# Altium PCB Flasher_2Ch_ISO_Astable.PcbDoc
Units mil, origin at the board's own origin, x right, y up, seen from the top; angles counter-clockwise.
Board outline 2362.21 x 1771.65 mil, 2 copper layers (Top Layer, Bottom Layer); 36 components, 22 nets, 82 pads, 0 vias.
Unrouted connection lines stored in the file: 50.
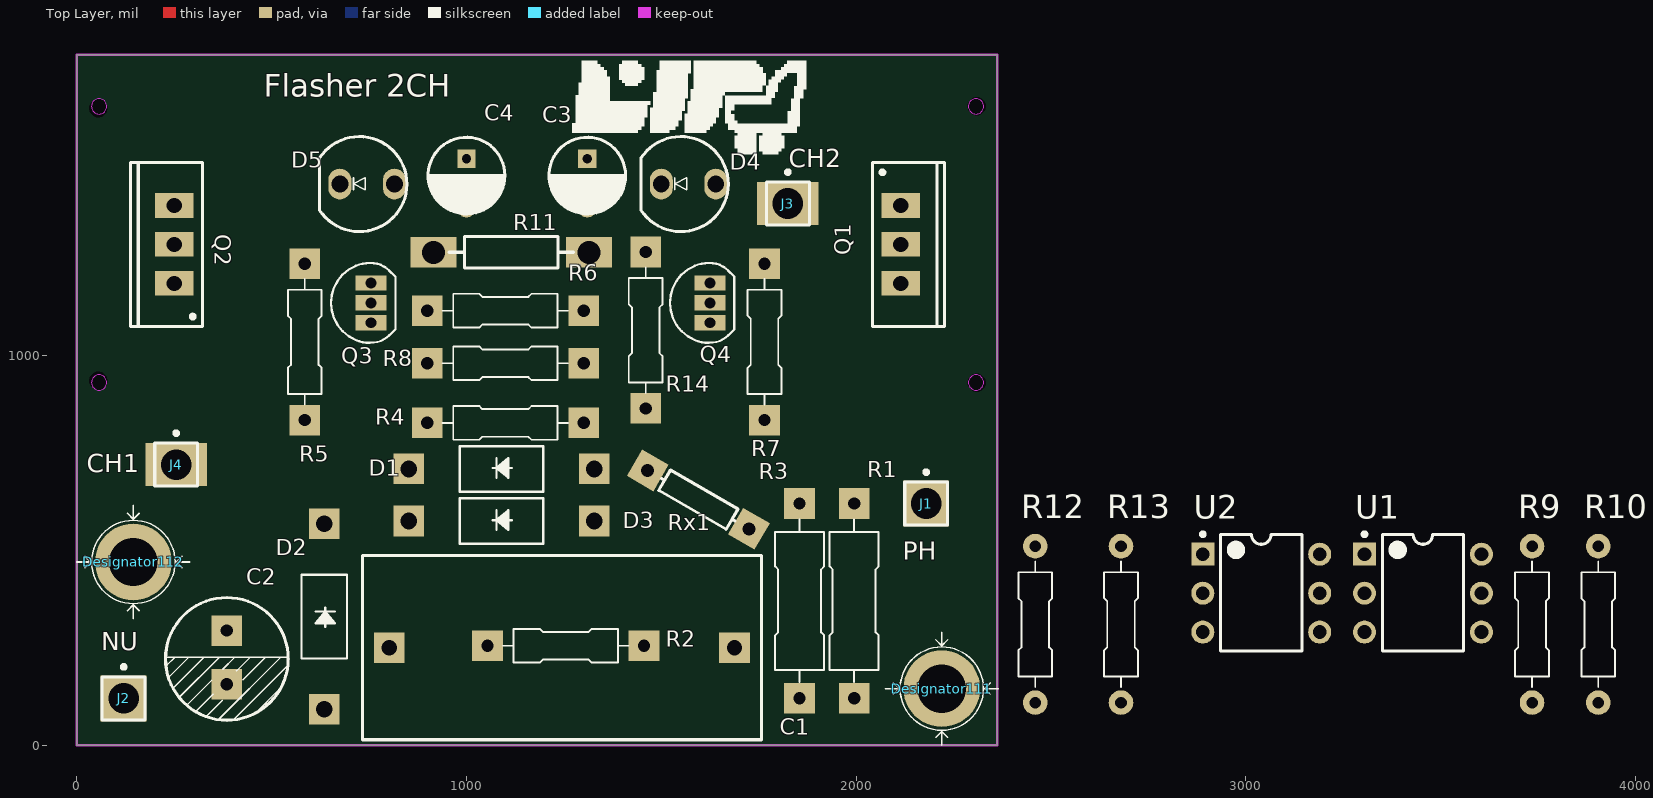
[diagram p0: Top Layer view]
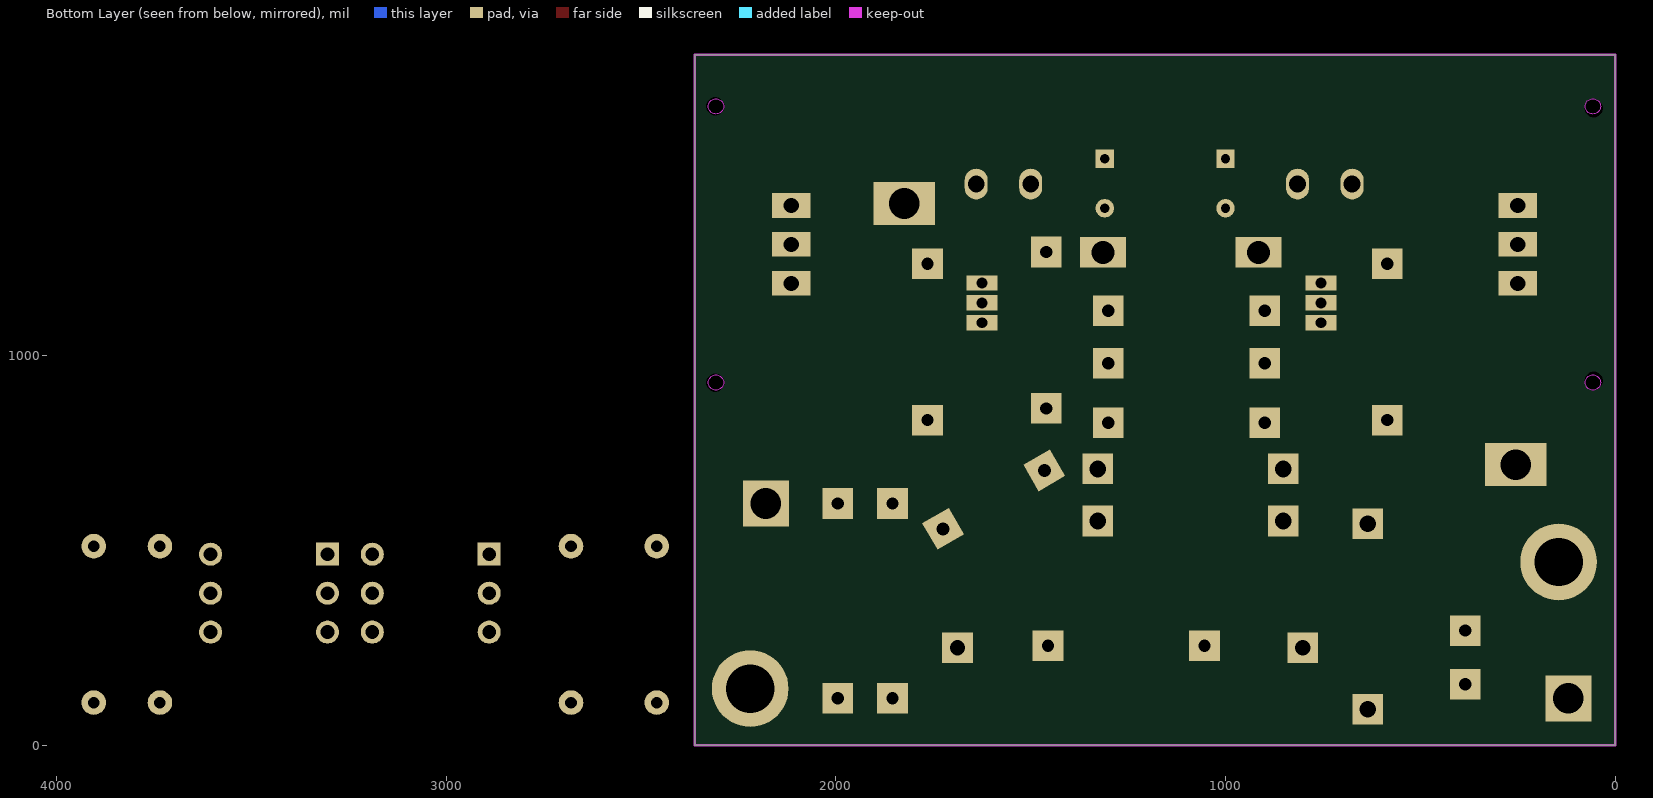
[diagram p1: Bottom Layer view, seen from below]

## Layer stack, top to bottom
Top Solder: solder mask 0.4, Solder Resist, Dk 3.5
Top Layer: signal copper 1.4
Dielectric 1: dielectric 12.6, FR-4, Dk 4.8
Bottom Layer: signal copper 1.4
Bottom Solder: solder mask 0.4, Solder Resist, Dk 3.5

## Board outline
0,0 2362.21,0 2362.19,1771.65 0,1771.65

## Design rules (kind name [scope] priority, off if disabled: settings)
Clearance [All] p1: gap=15 ignorepadtopadclearanceinfootprint=TRUE except(10: Arc-THPad Track-THPad THPad-THPad; 11: Arc-Arc Arc-Track Track-Track)
PolygonConnect [All] p1: connectstyle=Relief reliefconductorwidth=10 reliefentries=4 polygonreliefangle="90 Angle" airgapwidth=10
RoutingVias [All] p1: holewidth=28 width=50 viastyle="Through Hole" minholewidth=28 minwidth=50 maxholewidth=28 maxwidth=50
SolderMaskExpansion [All] p1: expansion=4 istentingtop=FALSE
Width [All] p1: maxlimit=200 minlimit=10 preferedwidth=50 minimp=50.000000 maximp=50.000000 favimp=50.000000
30 further rules are at their usual default settings.

## Classes and differential pairs
component class Flasher_2Ch_ISO_Astable: C1 C2 C3 C4 D1 D2 D3 D4 J1 J2 J3 Q1 Q2 Q4 R1 R2 R3 R5 R8 R12 R14 Rx1 U1 U2

## Components (designator, comment, footprint, x,y, rotation, side; value= is the part's Value field where it differs from the comment)
C1 "Cap" Cap_polyester_275V_P22.5 1245,250 r0 top value=1uF/275V/X2
C2 "Cap2" "Cap electrolitic radial 8x12-3.5" 385,225 r270 top value=470uF/16V
C3 "Cap2" "Cap electrolitic radial 5x11-2" 1310,1465.63 r270 top value=100uF/16V
C4 "Cap2" "Cap electrolitic radial 5x11-2" 1000,1465.63 r270 top value=100uF/16V
D1 "Diode 1N4007" DO-204AL 1095,713.96 r180 top
D2 "8.2V/1W" DO-204AL 640,325 r90 top
D3 "Diode 1N4007" DO-204AL 1095,580 r180 top
D4 "LED0" LED5MM_RED 1550,1440 r180 top
D5 "LED0" LED5MM_RED 725,1440 r180 top
Designator111 "Comment" "Board Screw simple 3mm" 2220,145 r0 top
Designator112 "Comment" "Board Screw simple 3mm" 145,470 r0 top
J1 "Socket" PIN1#1 2180,620 r0 top
J2 "Socket" PIN1#1 120,120 r0 top
J3 "Socket" PIN1#2 1825,1390 r0 top
J4 "Socket" PIN1#2 255,720 r0 top
Q1 "BT137-600" "TO-220 AB with heatsink ya25" 2115,1285 r270 top
Q2 "BT137-600" "TO-220 AB with heatsink ya25" 250,1285 r90 top
Q3 "2N3904" "TO-92 STR" 755,1135 r90 top
Q4 "2N3904" "TO-92 STR" 1625,1135 r90 top
R1 "Res1" "Axial 0_5W 5_0mm" 1995,370 r90 top value=100/0.5W
R2 "Res1" "Axial 0_25 W, 0_4 IN LEAD PITCH"#1 1255,255 r0 top value=470K
R3 "Res1" "Axial 0_5W 5_0mm" 1855,370 r90 top value=100/0.5W
R4 "Res1" "Axial 0_25 W, 0_4 IN LEAD PITCH"#1 1100,827.08 r180 top value=100R
R5 "Res1" "Axial 0_25 W, 0_4 IN LEAD PITCH"#1 585,1035 r270 top value=560R
R6 "Res1" "Axial 0_25 W, 0_4 IN LEAD PITCH"#1 1100,1115 r180 top value=39K
R7 "Res1" "Axial 0_25 W, 0_4 IN LEAD PITCH"#1 1765,1035 r90 top value=560R
R8 "Res1" "Axial 0_25 W, 0_4 IN LEAD PITCH"#1 1100,980 r0 top value=39K
R9 "Res1" "Axial 0_25 W, 0_4 IN LEAD PITCH"#2 3735,310 r90 top value=360
R10 "Res1" "Axial 0_25 W, 0_4 IN LEAD PITCH"#2 3905,310 r90 top value=360
R11 "Res Adj1" AXIAL-0.4 1115,1265 r0 top value=10K
R12 "Res1" "Axial 0_25 W, 0_4 IN LEAD PITCH"#2 2460,310 r90 top value=360
R13 "Res1" "Axial 0_25 W, 0_4 IN LEAD PITCH"#2 2680,310 r90 top value=360
R14 "Res1" "Axial 0_25 W, 0_4 IN LEAD PITCH"#1 1460,1065 r270 top value=680R
Rx1 "Res1" axial-0.3 1595.1,630 r150 top value=0R
U1 "MOC3063" DIP-6 3305,490 r0 top
U2 "MOC3063" DIP-6 2890,490 r0 top

## Footprints (in the part's own frame and the unit in brackets; to place one, negate y for a bottom-side part, rotate by r counter-clockwise, add the part's x,y. Pads: shape width x height; smd on the part's side, far side on the other; paste and mask are expansions set on the pad)
"Axial 0_5W 5_0mm" [mm] "Designer Abbas Basereh"
  rect 2x2 hole 0.8: 1(6.35,0) 2(-6.35,0)
  silkscreen extent -5.3,-1.6 5.3,1.6, body extent -6.7,-1.65 6.7,1.65, height 4.02
"Axial 0_25 W, 0_4 IN LEAD PITCH"#1 [mm] "Designer Abbas Basereh"
  rect 2x2 hole 0.8: 1(5.1,0) 2(-5.1,0)
  silkscreen extent -4.1,-1.1 4.1,1.1, body extent -5.4,-1.16 5.36,1.16, height 3.63
"Axial 0_25 W, 0_4 IN LEAD PITCH"#2 [mm] "Designer Abbas Basereh"
  round 1.6 hole 0.75: 1(5.1,0) 2(-5.1,0)
  silkscreen extent -4.1,-1.1 4.1,1.1, body extent -5.4,-1.16 5.36,1.16, height 3.63
axial-0.3 [mm] "Axial Device, Thru-Hole; 2 Leads; 0.3 in Pin Spacing"
  rect 2x2 hole 0.85: 1(-3.81,0) 2(3.81,0)
  silkscreen extent -2.77,-0.76 2.77,0.76
AXIAL-0.4 [mm] "Axial Device, Thru-Hole; 2 Leads; 0.4 in Pin Spacing"
  rect 3x2 hole 1.5: 1(-5.08,0) 2(5.08,0)
  silkscreen extent -4.06,-1.02 4.06,1.02
"Board Screw simple 3mm" [mm]
  round 5 hole 3.15 mask+0.1: S(0,0)
  silkscreen extent -3.68,-3.68 3.68,3.68
"Cap electrolitic radial 5x11-2" [mm] "Cap electrolitic radial 5x11-2-Design:Abbas Basereh"
  rect 1.2x1.2 hole 0.6: 1(-1,0)
  round 1.2 hole 0.6: 2(2.227,0)
  silkscreen extent -2.4,-2.5 2.6,2.5, body extent -2.5,-2.5 2.5,2.5, height 11.3
"Cap electrolitic radial 8x12-3.5" [mm] "Cap electrolitic radial 8x12-3.5-Design:Abbas Basereh"
  rect 2x2 hole 0.8: 1(-1.75,0) 2(1.75,0)
  silkscreen extent -3.9,-4 4.1,4, body extent -4,-4 4,4, height 12.3
Cap_polyester_275V_P22.5 [mm]
  rect 2x2 hole 1: 1(11.25,0) 2(-11.25,0)
  silkscreen extent -13,-6 13,6, body extent -13.08,-4.95 13.42,5.05, height 20.6
DIP-6 [mm]
  rect 1.5x1.5 hole 0.9: 1(0,0)
  round 1.5 hole 0.9: 2(0,-2.54) 3(0,-5.08) 4(7.62,-5.08) 5(7.62,-2.54) 6(7.62,0)
  silkscreen extent -0.12,-6.3 6.46,1.42, body extent -0.16,-6.63 7.84,1.45, height 4.31
DO-204AL [mm]
  rect 2x2 hole 1.1 mask+0: 1(-5.918,0.127) 2(6.172,0.127)
  silkscreen extent -2.6,-1.36 2.86,1.61, body extent -6.44,-1.14 6.54,1.58, height 2.72
LED5MM_RED [mm] "LED 5MM THROUGH HOLE RED-Designer Abbas Basereh"
  oval 1.5x2 hole 1.1: 1(-2.286,0) 2(1.27,0)
  silkscreen extent -3.1,-3.1 2.6,3.1, body extent -3,-3 2.5,3, height 9.14
PIN1#1 [mm] "Connector; Plug"
  rect 3x3 hole 2: 1(0,0)
  silkscreen extent -1.4,-1.4 1.4,2.17
PIN1#2 [mm]
  rect 4x2.8 hole 2: 1(0,0)
  silkscreen extent -1.4,-1.4 1.4,2.17
"TO-92 STR" [mm] "DESIGNER :ABBAS BASEREH"
  rect 1x2 hole 0.7 mask+0.06: 1(-1.3,0) 2(0,0) 3(1.3,0)
  silkscreen extent -2.6,-1.59 2.6,2.61, body extent -2.61,-1.59 2.61,2.61, height 10
"TO-220 AB with heatsink ya25" [mm] "Epoxy meets UL94, V0-Design:Abbas Basereh"
  rect 1.6x2.5 hole 1: 1(-2.54,0) 2(0,0) 3(2.54,0)
  Keep-Out Layer board cut-out: -8.5,4.9 -8.538,5.091 -8.646,5.254 -8.809,5.362 -9,5.4 -9,5.4 -9.191,5.362 -9.354,5.254 -9.462,5.091 -9.5,4.9 -9.5,4.9 -9.5,4.9 -9.462,4.709 -9.354,4.546 -9.191,4.438 -9,4.4 -9,4.4 -8.809,4.438 -8.646,4.546 -8.538,4.709 -8.5,4.9 -8.5,4.9
  Keep-Out Layer board cut-out: 9.5,4.9 9.462,5.091 9.354,5.254 9.191,5.362 9,5.4 9,5.4 8.809,5.362 8.646,5.254 8.538,5.091 8.5,4.9 8.5,4.9 8.5,4.9 8.538,4.709 8.646,4.546 8.809,4.438 9,4.4 9,4.4 9.191,4.438 9.354,4.546 9.462,4.709 9.5,4.9 9.5,4.9
  silkscreen extent -5.35,-1.85 5.35,2.85, body extent -11.75,-4.08 11.75,12.92, height 25

## Part data
C1 C2 C3 C4: "Capacitor", Publisher="Altium Limited"
  C1: LatestRevisionDate=17-Jul-2002, LatestRevisionNote="Re-released for DXP Platform.", PackageDescription="Radial Cap, Thru-Hole; 2 Leads; 0.3 in Pin Spacing", PackageReference=RAD-0.3, Published=8-Jun-2000
  C2 C3 C4: PackageDescription="Capacitor; 2 Leads", PackageReference=CAPR5-4X5, Published=23-Sep-2002
D1 D3: "1 Amp General Purpose Rectifier", Code_JEDEC=DO-204-AL, ComponentLink1Description="Manufacturer Link", ComponentLink1URL=http://www.fairchildsemi.com/, ComponentLink2Description=Datasheet, ComponentLink2URL=http://www.fairchildsemi.com/ds/1N%2F1N4001.pdf, DatasheetVersion=1998, LatestRevisionDate=17-Jul-2002, LatestRevisionNote="Re-released for DXP Platform.", PackageDescription="Diode, Axial; Body 5.2 x 2.7 mm (LxDia. max), Lead Dia. 0.86 mm (max)", PackageReference=DO-41, PackageVersion=Aug-1999, Published=8-Jun-2000, Publisher="Altium Limited"
D2: library part "D Zener", "Zener Diode", LatestRevisionDate=17-Jul-2002, LatestRevisionNote="Re-released for DXP Platform.", PackageDescription="Diode, Thru-Hole; 2 Leads; 0.7 in Pin Spacing", PackageReference=DIODE-0.7, Published=8-Jun-2000, Publisher="Altium Limited"
D4 D5: "Typical INFRARED GaAs LED", LatestRevisionDate=08-Jul-2005, LatestRevisionNote="Mech Layer 1 removed.", PackageDescription="LED; 2 Leads", PackageReference=LED-0, Published=8-Jun-2000, Publisher="Altium Limited"
Q1 Q2: library part Triac, "Silicon Bidirectional Triode Thyristor", ComponentLink1Description="Manufacturer Link", ComponentLink1URL=http://www.motorola.com/, DatasheetVersion=1999, LatestRevisionDate=17-Jul-2002, LatestRevisionNote="Re-released for DXP Platform.", Note="Pin 2 is electrically connected to Pin 4 (TAB)", PackageDescription="TO, Thru-Hole, Vertical, Heatsink Mounted; 3 In-Line Leads; Pitch 2.28 mm", PackageReference=369-03, Published=29-Sep-2000, Publisher="Altium Limited"
Q3 Q4: "NPN General Purpose Amplifier", ComponentLink1Description="Manufacturer Link", ComponentLink1URL=http://www.fairchildsemi.com/, ComponentLink2Description=Datasheet, ComponentLink2URL=http://www.fairchildsemi.com/ds/2N%2F2N3904.pdf, DatasheetVersion=1997, LatestRevisionDate=15-Jan-2003, LatestRevisionNote="PCB Footprint 'BCY-W3/D4.7' replaced", PackageDescription="TO, Flat Index; 3 In-Line, Axial Leads; Body Dia. 4.5mm; Leads 0.51 x 0.48 mm (max)", PackageReference=TO-92A, PackageVersion=Sep-1998, Published=8-Jun-2000, Publisher="Altium Limited"
R1 R2 R3 R4 R5 R6 R7 R8 R9 R10 R12 R13 R14 Rx1: "Resistor", LatestRevisionDate=17-Jul-2002, LatestRevisionNote="Re-released for DXP Platform.", PackageDescription="Axial Device, Thru-Hole; 2 Leads; 0.3 in Pin Spacing", PackageReference=AXIAL-0.3, Published=8-Jun-2000, Publisher="Altium Limited"
R11: "Variable Resistor", LatestRevisionDate=17-Jul-2002, LatestRevisionNote="Re-released for DXP Platform.", PackageDescription="Axial Device, Thru-Hole; 2 Leads; 0.7 in Pin Spacing", PackageReference=AXIAL-0.7, Published=8-Jun-2000, Publisher="Altium Limited", Set Position=0.5
U1 U2: library part "Opto TRIAC", "Opto-Triac", LatestRevisionDate=17-Jul-2002, LatestRevisionNote="Re-released for DXP Platform.", PackageDescription="SIP; 4 Leads; Body 10 x 11.5 x 7.5 mm (typ); Pitch 2.54 mm", PackageReference=NPSIP4A, Published=24-Mar-1999, Publisher="Altium Limited"
J1 J2 J3 J4: LatestRevisionDate=17-Jul-2002, LatestRevisionNote="Re-released for DXP Platform.", Publisher="Altium Limited"

## Free pads (board coordinates)
  round 39.37 hole 47.24: ""(55,935) ""(55,1635) ""(2310,930) ""(2310,1640)

## Nets (pads, with @x,y where several pads share a name; then routed paths per layer and width w, separated by ;. In a path a pad name is that pad's centre, name@x,y a point inside that pad or via, vN(x,y) a via of type N, cw(c..) or ccw(c..) an arc to the next point about the centre after c; other vN are vias at no path point)
GND: C2.2 D2.1 D3.1 J2.1 Q3.1 Q4.1
NetC1_1: C1.1 R1.2 R2.1 R3.2
NetC1_2: C1.2 D1.1 D3.2 R2.2
NetC2_1: C2.1 D1.2 R4.2
NetC3_1: C3.1 D5.1 R5.1
NetC3_2: C3.2 Q4.2 R8.1 R14.1
NetC4_1: C4.1 D4.1 R7.1
NetC4_2: C4.2 Q3.2 R6.1 R11.1
NetD4_2: D4.2 U1.1
NetD5_2: D5.2 U2.1
NetJ3_1: J3.1 Q1.1 R12.2
NetJ4_1: J4.1 Q2.1 R13.1
NetQ1_2: Q1.2 R9.2
NetQ1_3: Q1.3 R12.1 U2.4
NetQ2_3: Q2.3 R13.2 U1.4
NetQ3_3: Q3.3 U2.2
NetQ4_3: Q4.3 U1.2
NetR9_1: R9.1 U2.6
NetR10_2: R10.2 U1.6
NetR11_2: R11.2 R14.2
Phase: J1.1 Q2.2 R1.1 R3.1 R10.1
VCC: D2.2 R4.1 R5.2 R6.2 R7.2 R8.2 Rx1.1 Rx1.2
pads on no net: Designator111.S Designator112.S U1.3 U1.5 U2.3 U2.5

## Keep-outs
Keep-Out Layer:
  the board outline again, w5.98

## Silkscreen, mask and mechanical layers (free items; w line width, h text height)
Top Overlay:
  drawing of 4 lines, arcs and shapes, not listed
  text "Flasher 2CH" at 480,1645 h100
  text "CH2" at 1827.5,1467.5 h80
  text "CH1" at 25,685 h80
  text "PH" at 2120,460 h80
  text "NU" at 62.5,227.5 h80

## Dimensions
0,1771.65 to 2362.19,1771.65 on Mechanical 15
0,0 to 0,1771.65 on Mechanical 15